# Altium PCB Spektrum Adapter.PcbDoc
Units mil, origin at the board's own origin, x right, y up, seen from the top; angles counter-clockwise.
Board outline 695 x 275 mil, 2 copper layers (Top Layer, Bottom Layer); 8 components, 5 nets, 24 pads, 2 vias.
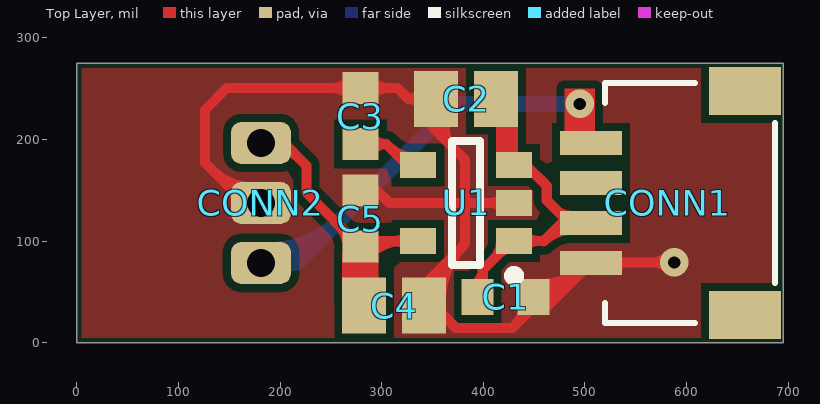
[diagram p0: Top Layer view]
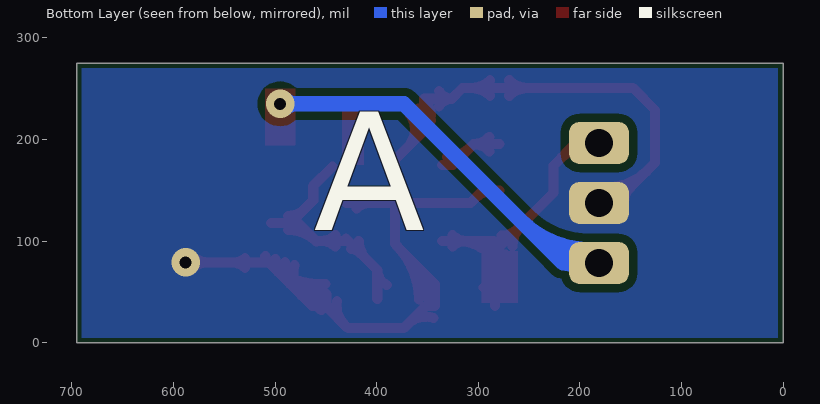
[diagram p1: Bottom Layer view, seen from below]
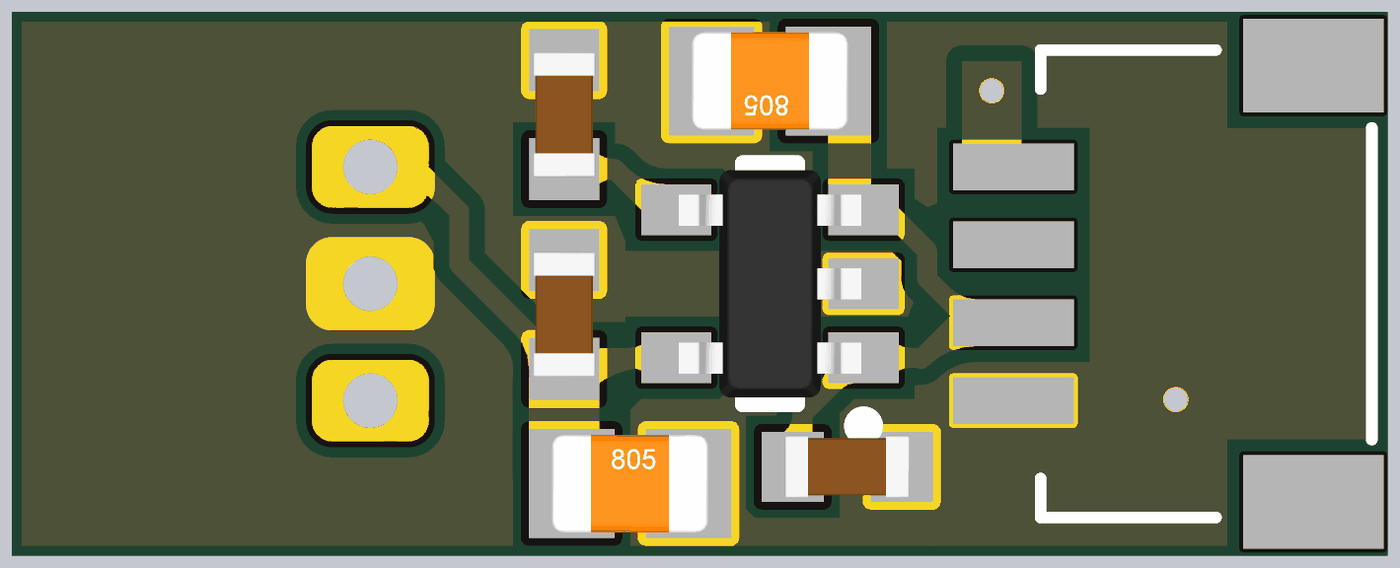
[diagram p2: 3D render of the assembled board from above, using the file's embedded part models]

## Layer stack, top to bottom
Top Layer: signal copper 1.4
Dielectric: dielectric 12.6, FR-4, Dk 4.8
Bottom Layer: signal copper 1.4

## Board outline
0,0 695,0 695,275 0,275

## Design rules (kind name [scope] priority, off if disabled: settings)
Clearance "Bottom Poly Clearance" [InNamedPolygon('Ground Layer-GND')] p1: gap=8
Clearance [All] p2: gap=8
MinimumSolderMaskSliver [All] p1: minsoldermaskwidth=6
PolygonConnect [All] p1: connectstyle=Direct reliefconductorwidth=10 reliefentries=4 polygonreliefangle="90 Angle"
RoutingVias [All] p1: holewidth=28 width=50 viastyle="Through Hole" minholewidth=28 minwidth=50 maxholewidth=28 maxwidth=50
SilkscreenOverComponentPads [All] p1: minsilkscreentomaskgap=8
SolderMaskExpansion [All] p1: expansion=4
Width [All] p1: maxlimit=20 minlimit=10 preferedwidth=10 minimp=50.000000 maximp=50.000000 favimp=50.000000
26 further rules are at their usual default settings.

## Components (designator, comment, footprint, x,y, rotation, side; value= is the part's Value field where it differs from the comment)
C1 "Cap603" CAP603L 422,45 r0 top
C2 "Cap805" CAP805L 383,240 r180 top
C3 "Cap603" CAP603L 279,223 r90 top
C4 "Cap805" CAP805L 312.28,36.49 r0 top
C5 "Cap603" CAP603L 279,122 r90 top
CONN1 "USART" "JST SH 4 Pin Side Entry" 687,137.5 r90 top locked
CONN2 "JST ZH 3 Pin" "JST ZH 3 PIN SIDE ENTRY" 0,137.5 r270 top locked
U1 "LP2985-3.3" SOT23-5L 383,137.5 r180 top

## Footprints (in the part's own frame and the unit in brackets; to place one, negate y for a bottom-side part, rotate by r counter-clockwise, add the part's x,y. Pads: shape width x height; smd on the part's side, far side on the other; paste and mask are expansions set on the pad)
CAP603L [mm] "Chip Capacitor, Body 1.6x0.8mm, IPC High Density"
  rect 0.8x0.9 smd: 1(-0.7,0) 2(0.7,0)
  body extent -0.8,-0.4 0.8,0.4, height 0.77
CAP805L [mm] "Chip Capacitor, Body 2.0x1.3mm, IPC High Density"
  rect 1.1x1.4 smd: 1(-0.75,0) 2(0.75,0)
  body extent -1,-0.62 1,0.63, height 0.78
"JST SH 4 Pin Side Entry" [mm] "SM04B-SRSS-TB"
  rect 1.2x1.8 smd paste+0 mask+0.051: 0(-2.8,0.75) 0(2.8,0.75)
  rect 0.6x1.55 smd paste+0 mask+0.051: 1(-1.5,4.6) 2(-0.5,4.6) 3(0.5,4.6) 4(1.5,4.6)
  silkscreen extent -3,0 3,4.25, body extent -3,0 3,4.25, height 2.9
"JST ZH 3 PIN SIDE ENTRY" [mm] "S3B-ZR(LF)(SN) - Spektrum Sat Connector"
  rrect50% 1.05x1.5 hole 0.7 paste+0 mask+0.076: 1(-1.5,4.6) 2(0,4.6) 3(1.5,4.6)
  body extent -3,0 3,6, height 3
SOT23-5L [mm] "SOT23, 5-Leads, Body 2.9x1.6mm, Pitch 0.95mm, Lead Span 2.8mm, IPC High Density"
  rect 0.9x0.65 smd mask+0.076: 1(-1.2,0.95) 2(-1.2,0) 3(-1.2,-0.95) 4(1.2,-0.95) 5(1.2,0.95)
  silkscreen extent -1.33,-1.55 0.35,1.95, body extent -1.17,-1.46 1.17,1.46, height 0.97

## Part data
C1 C2 C3 C4 C5: "Capacitor SMD"
CONN1: library part "JST-SH 4-pin Side Entry Socket", "JST-SH 4-pin Side Entry Socket"
CONN2: library part "JST ZH 3-pin Side Entry Socket", "JST ZH 1.5mm 3-pin Side Entry Socket"
U1: "3.3V 150mA LDO Regulator"

## Via types
v1: diameter 28, hole 12, Top Layer to Bottom Layer, tented both sides, 2 vias

## Nets (pads, with @x,y where several pads share a name; then routed paths per layer and width w, separated by ;. In a path a pad name is that pad's centre, name@x,y a point inside that pad or via, vN(x,y) a via of type N, cw(c..) or ccw(c..) an arc to the next point about the centre after c; other vN are vias at no path point)
GND: C1.2 C2.2 C3.2 C4.2 C5.2 CONN1.1 CONN2.2 U1.2 | length 1866.6
  Top Layer w10: 133.98,169.02 ccw(c172.24,207.28) CONN2.2@172.24,153.17 ; 150.26,152.74 cw(c135.03,137.5) CONN2.2@156.57,137.5 ; 151.05,151.95 ccw(c172.24,173.14) CONN2.2@172.24,143.17 ; CONN2.2@171,132 126,177 126,229 147.56,250.56 C3.2 315.44,250.56 326,240 ; C3.2@269.43,242.96 ccw(c251.08,224.61) 251.08,250.56 ccw(c251.08,276.51) C3.2@269.43,258.16 ; C5.2 295.44,149.56 307.5,137.5 U1.2 ; C5.2@281.14,148.83 cw(c286.32,127.14) 302.09,142.91 ; C3.2@288.57,242.96 cw(c306.92,224.61) 306.92,250.56 cw(c306.92,276.51) C3.2@288.57,258.16 ; C2.2@338.71,232.3 ccw(c326,225.67) 326,240 ; C2.2@338.71,247.7 cw(c326,254.33) 326,240 ; C4.2@343.89,24.27 cw(c351.7,0.48) 369.41,18.19 ; C4.2@348.47,42.4 cw(c399.32,42.4) 363.36,78.36 ; C2.2@350.78,236.08 ccw(c367.39,223.81) 352.79,209.21 ; C4.2@358.47,42.4 cw(c433.46,42.4) 380.43,95.43 ; C2.2@358.82,230.14 ccw(c376.84,216.83) 361,201 ; C2.2@366.87,224.2 ccw(c386.29,209.86) 369.22,192.78 ; U1.2@419.81,131.99 ccw(c406.5,118.68) 406.5,137.5 ccw(c406.5,156.32) U1.2@419.81,143.01 ; 432.02,18.02 ccw(c413.99,36.05) C1.2@439.01,40.96 ; C1.2@448.91,37.74 ccw(c451.27,71.08) 474.9,47.45 ; C1.2 449.56,35.56 428.28,14.28 373.31,14.28 351.59,36 342.53,36 342.53,57.53 382,97 382,137.5 382,180 353.47,208.53 ; C1.2@449.61,47.71 ccw(c453.31,100.03) 490.4,62.94 ; C1.2@450.32,57.69 ccw(c455.36,128.98) CONN1.1 ; C1.2@454.56,32 458.56,36 463.45,36 CONN1.1 ; 472.8,45.35 ccw(c450.64,67.52) CONN1.1@480.67,76.49 ; 484.66,57.2 ccw(c468.89,72.97) CONN1.1@490.25,79.36 ; CONN1.1@496.51,69.05 ccw(c487.13,78.43) CONN1.1@499.83,82.22 ; CONN1.1@508.36,80.9 ccw(c505.38,83.88) CONN1.1@509.41,85.09 ; CONN1.1@529.41,73.63 cw(c542.38,60.66) 542.38,79 ; CONN1.1@529.41,83.26 ccw(c539.7,93.55) 539.7,79 ; v1@581.64,72.64 ccw(c566.27,57.27) 566.27,79 ccw(c566.27,100.73) v1@581.64,85.36 ; v1(588,79) 506.45,79 CONN1.1 ; 326,240 C2.2 353.47,208.53 ; 353.47,208.53 ccw(c342.18,208.53) 346.74,218.86 cw(c342.18,208.53) 353.47,208.53 ; 353.47,208.53 cw(c364.77,208.53) 360.2,218.86 ccw(c364.77,208.53) 353.47,208.53
  Bottom Layer w10: CONN2.2@169.6,126 CONN2.2
NetC1_1: C1.1 C2.1 CONN1.2 U1.1 U1.3 | length 402.9
  Top Layer w10: C1.1@389.99,56.75 ccw(c383.3,71.44) 399.44,71.44 ; C1.1@399.44,43 399.44,71.44 ; 410.05,82.05 ccw(c392.01,100.1) U1.1@417.53,100.1 ; U1.1@416.75,88.75 cw(c425.32,80.18) U1.1@425.32,92.3 ; U1.1@440.68,94.59 cw(c453.98,81.28) 453.98,100.1 cw(c453.98,118.92) U1.1@440.68,105.61 ; U1.3@443.32,173.32 462.39,154.25 462.39,139.99 484.56,117.82 CONN1.2@503.9,117.82 ; 459.22,99.41 cw(c487.2,71.44) CONN1.2@487.2,111 ; 471.07,131.31 ccw(c487.2,147.43) CONN1.2@487.2,124.63 ; CONN1.2@477.43,124.94 cw(c470.31,117.82) CONN1.2@480.39,117.82 ; CONN1.2@482.56,117.82 CONN1.2@503.9,117.82 ; 399.44,71.44 430.24,102.24 U1.1 459.9,100.1 477.62,117.82 CONN1.2@503.9,117.82
NetC3_1: C3.1 U1.4 | length 126
  Top Layer w10: C3.1 304.56,195.44 ; C3.1@289.08,188.39 cw(c304.56,174.93) 304.56,195.44 ; C3.1@289.08,202.49 ccw(c304.56,215.95) 304.56,195.44 ; 307.74,192.27 ccw(c330.83,215.36) U1.4@330.83,182.7 ; U1.4 325.1,174.9 304.56,195.44
NetC4_1: C4.1 C5.1 CONN2.1 U1.5 | length 528.1
  Top Layer w10: CONN2.1 203.44,196.56 226,174 226,147.44 C5.1 ; CONN2.1@190.71,190.94 cw(c195.1,158.21) 218.44,181.56 ; 257.29,116.15 cw(c235.58,94.44) C5.1@266.28,94.44 ; 262.04,111.4 ccw(c277.03,126.38) C5.1@277.03,105.19 ; C4.1@270.98,54.18 ccw(c240.82,84.33) C5.1@283.47,84.33 ; C5.1@273.37,86.84 cw(c248.98,62.45) C4.1@283.47,62.45 ; C5.1@281.5,93.91 cw(c296.43,78.98) C5.1@296.43,100.1 ; C4.1@283.47,36 283.47,98.91 284.66,100.1 U1.5 ; 283.47,74.54 cw(c300.87,74.54) 288.57,86.84 cw(c320.57,54.83) U1.5@320.57,100.1 ; C5.1@283.47,80.88 ccw(c321.23,80.88) C4.1@294.53,54.18 ; U1.5@325.32,94.59 ccw(c312.02,81.28) 312.02,100.1 ccw(c312.02,118.92) U1.5@325.32,105.61
NetCONN1_4: CONN1.4 CONN2.3 | length 562.3
  Bottom Layer w15: CONN2.3 216.44,78.44 ; CONN2.3@189.96,76.61 ccw(c189.96,136.13) 232.05,94.05 ; CONN2.3@189.96,91.61 ccw(c189.96,187.35) 257.65,119.65 ; CONN2.3@200.46,70.5 cw(c216.44,58.4) 216.44,78.44 ; CONN2.3@200.46,86.39 ccw(c216.44,98.49) 216.44,78.44 ; v1@490.4,230.4 ccw(c479.31,219.31) 479.31,235 ccw(c479.31,250.69) v1@490.4,239.6 ; v1(495,235) 373,235 216.44,78.44
pads on no net: CONN1.0 CONN1.3

## Polygon pours and split planes (outlines as drawn)
GND on Bottom Layer "Ground Layer-GND" (solid, remove dead copper, pour order 1001): 5,270 690,270 690,5 5,5
GND on Top Layer "Ground Layer-GND" (solid, remove dead copper, pour order 1000): 5,5 690,5 690,270 5,270

## Other copper
Top Layer:
  rectangle net NetC4_1: 261.08,39 296.7,89.96
  rectangle net NetC1_1: 412.53,174.9 434,241
  rectangle net NetCONN1_4: 480,194 510,250

## Silkscreen, mask and mechanical layers (free items; w line width, h text height)
Bottom Overlay:
  text "A" at 462,72 h200
Board Dimensions:
  the board outline again, w1